# EAGLE board answer (EAGLE 7.4.0)

Size 40 x 25 mm. Coordinates in mm from the lower left corner, seen from the top.
Outline: 1.5,0 38.5,0 arc-90 40,1.5 40,23.5 arc-90 38.5,25 1.5,25 arc-90 0,23.5 0,1.5 arc-90 1.5,0
Copper layers used: 

## Footprints (pad centres in the part's own frame; a part is rotated, then mirrored left to right if it is on the bottom)
R0805 = smd 1 x 1.3: 1 -1,0; 2 1,0

## Placement (x,y rotation side)
R1  10k  [R0805]  10,10 0 top
R2  10k  [R0805]  20,15 0 top
R3  10k  [R0805]  30,10 0 top

## Library data of the parts
R1-R3 = synth